# Altium PCB Mini_sys.PcbDoc
Units mil, origin at the board's own origin, x right, y up, seen from the top; angles counter-clockwise.
Board outline 1771.65 x 905.51 mil, 2 copper layers (Top, Bottom); 18 components, 23 nets, 81 pads, 18 vias.
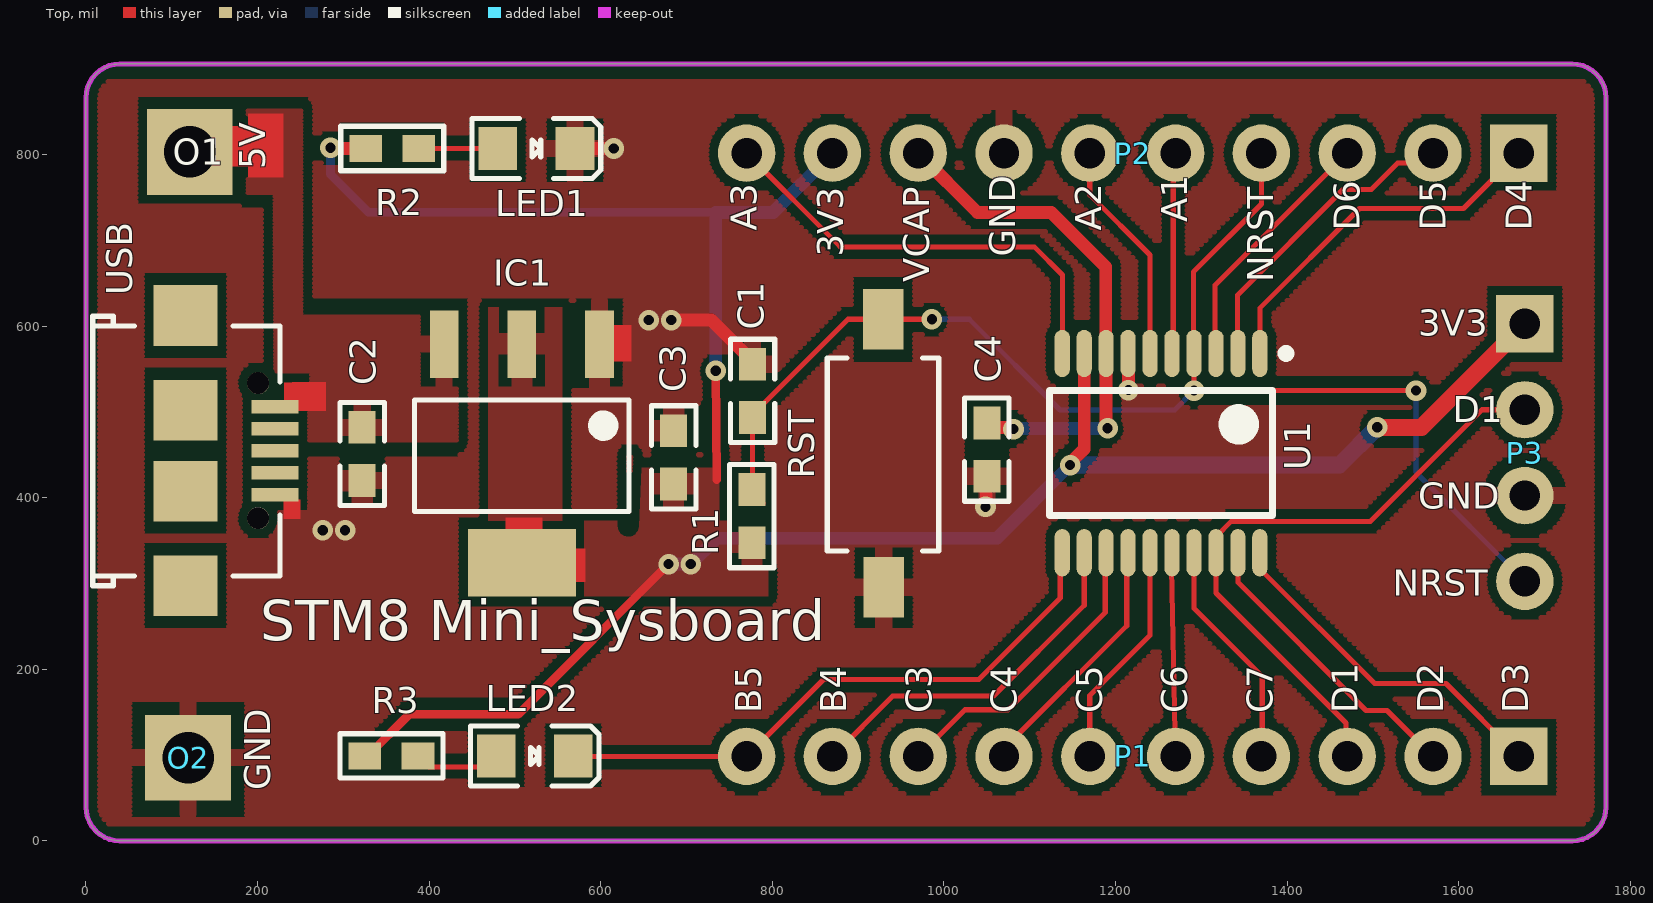
[diagram p0: Top view]
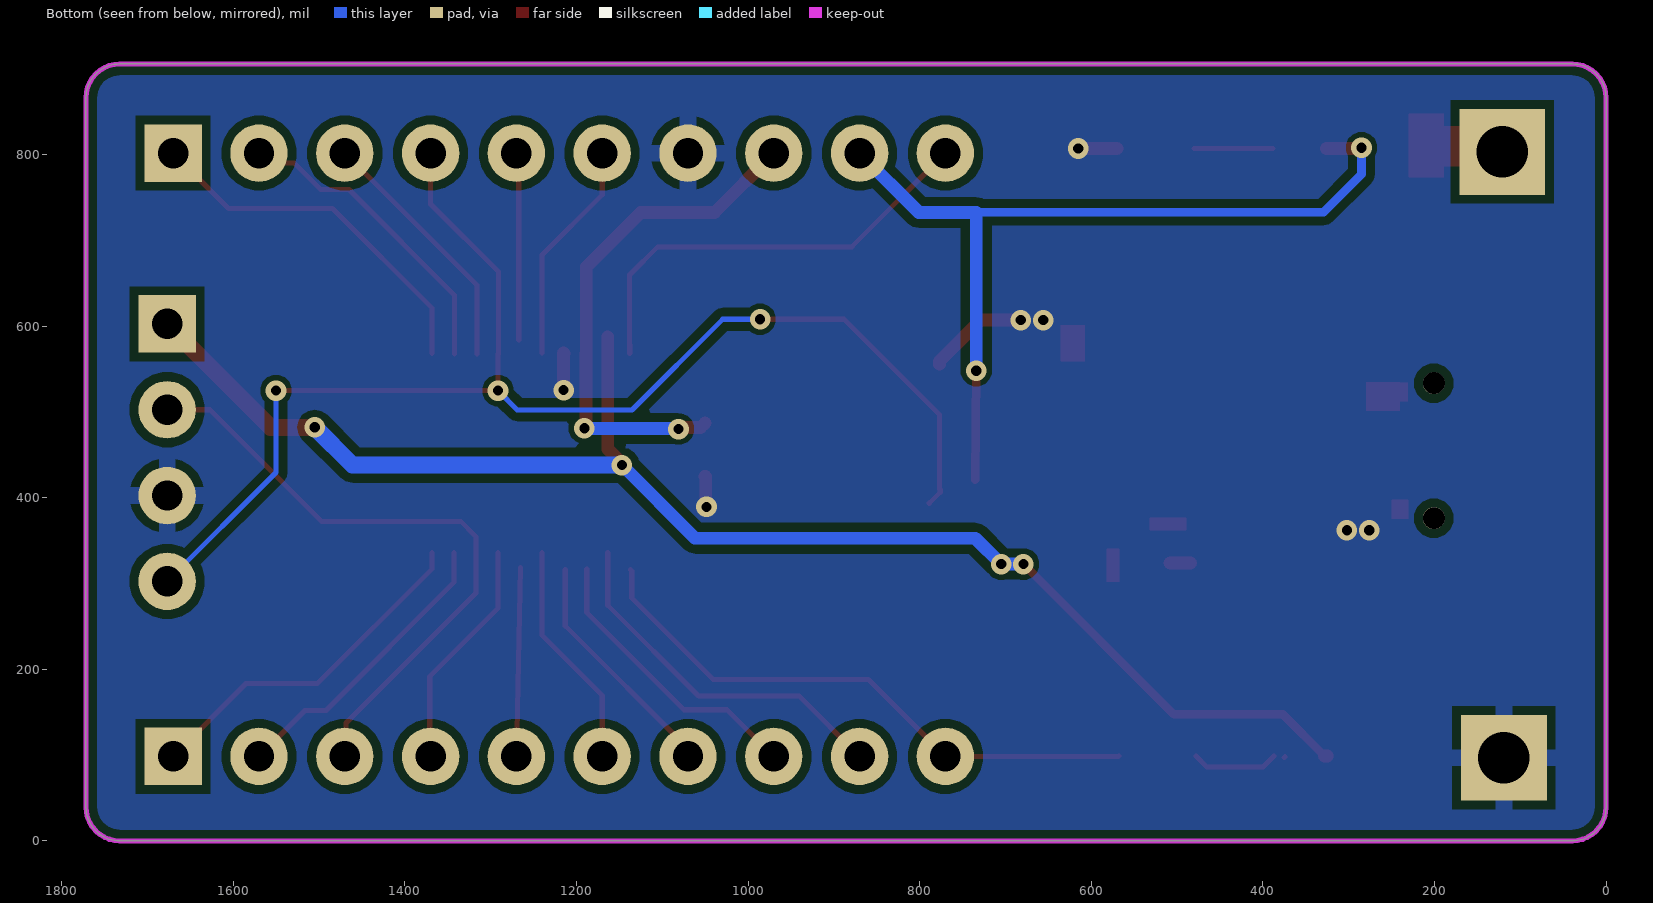
[diagram p1: Bottom view, seen from below]

## Layer stack, top to bottom
Top Solder: solder mask 0.4, Solder Resist, Dk 3.5
Top: signal copper 1.4
Dielectric 1: dielectric 12.6, FR-4, Dk 4.8
Bottom: signal copper 1.4
Bottom Solder: solder mask 0.4, Solder Resist, Dk 3.5

## Board outline
0,39.37 0,866.14 cw(c39.37,866.14) 39.37,905.51 1732.28,905.51 cw(c1732.28,866.14) 1771.65,866.14 1771.65,39.37 cw(c1732.28,39.37) 1732.28,0 39.37,0 cw(c39.37,39.37)

## Design rules (kind name [scope] priority, off if disabled: settings)
Clearance [All] p1: gap=6 ignorepadtopadclearanceinfootprint=TRUE except(10: Arc-Fill Arc-Poly Arc-Region Track-Fill Track-Poly Track-Region SMDPad-Fill SMDPad-Poly SMDPad-Region THPad-Fill THPad-Poly THPad-Region Fill-Fill Fill-Poly Fill-Region Poly-Poly Poly-Region Region-Region)
PolygonConnect [All] p1: thpad.connectstyle=Relief thpad.reliefconductorwidth=20 thpad.reliefentries=4 thpad.polygonreliefangle="90 Angle" thpad.airgapwidth=15 smdpad.connectstyle=Relief smdpad.reliefconductorwidth=20 smdpad.reliefentries=4 smdpad.polygonreliefangle="90 Angle" smdpad.airgapwidth=10 via.connectstyle=Direct via.reliefconductorwidth=10 via.reliefentries=4 via.polygonreliefangle="90 Angle" via.airgapwidth=10
RoomDefinition Mini_sys_board [InComponentClass('Mini_sys_board')] p1: confinementstyle=ConfineIn formatcopy=TRUE lockcomponents=FALSE outline -3750,-3685 -1750,-3685 -1750,-2685 -3750,-2685
RoutingVias [All] p1: holewidth=24 width=24 viastyle="Through Hole" minholewidth=24 minwidth=24 maxholewidth=24 maxwidth=24
SilkToSilkClearance [All] p1: silktosilkclearance=2
SilkToSolderMaskClearance [IsPad] p1: minsilkscreentomaskgap=2 clearancetoexposedcopper=TRUE
SolderMaskExpansion [All] p1: expansion=2.5 istentingtop=FALSE
Width PWR [InNetClass('PWR')] p1: maxlimit=20 minlimit=10 preferedwidth=15
Width [All] p2: maxlimit=6 minlimit=6 preferedwidth=6
28 further rules are at their usual default settings.

## Classes and differential pairs
net class D: D1 D2 D3 D4 D5 D6
net class C: C3 C4 C5 C6 C7
net class B: B4 B5
net class A: A1 A2 A3
net class PWR: 3V3 5V GND VCAP

## Components (designator, comment, footprint, x,y, rotation, side; value= is the part's Value field where it differs from the comment)
C1 "0.1uf" C0603 777,524.5 r90 top
C2 "0.1uf" C0603 322,451 r270 top
C3 "0.1uf" C0603 685,447 r90 top
C4 "0.1uf" C0603 1050,456 r270 top
IC1 "AMS1117" SOT223_N 508,449 r180 top
LED1 "LED" "LED 0805" 525,807 r0 top
LED2 "LED" "LED 0805" 523,99 r0 top
O1 "过孔" 过孔 121,803 r0 top
O2 "过孔" 过孔 119,97 r0 top
P1 "CON10" HDR2.54-LI-10P 1220,98.43 r180 top
P2 "CON10" HDR2.54-LI-10P 1220,801.57 r180 top
P3 "CON4" HDR2.54-WI-4P 1677,452.5 r270 top locked
R1 "10K" "R 0603" 776,378.5 r90 top
R2 "10K" "R 0603" 357,807 r0 top
R3 "10K" "R 0603" 356,99 r0 top
RST "Key" "TSW SMD-3*6*2.5" 929,453 r90 top (schematic designator Key1)
U1 "STM8S103F3" TSSOP20_L 1253,452 r270 top locked
USB "USB" USB-MICRO_E 168.17,454.76 r0 top (schematic designator USB1)

## Footprints (in the part's own frame and the unit in brackets; to place one, negate y for a bottom-side part, rotate by r counter-clockwise, add the part's x,y. Pads: shape width x height; smd on the part's side, far side on the other; paste and mask are expansions set on the pad)
C0603 [mm]
  rect 0.965x0.8 smd: 1(-0.787,0) 2(0.788,0)
  silkscreen extent -1.53,-0.66 1.53,0.66, body extent -0.83,-0.39 0.77,0.41, height 0.3
HDR2.54-LI-10P [mm] "排针，17脚"
  rect 1.7x1.7 hole 0.9: 1(-11.43,0)
  round 1.7 hole 0.9: 2(-8.89,0) 3(-6.35,0) 4(-3.81,0) 5(-1.27,0) 6(1.27,0) 7(3.81,0) 8(6.35,0) 9(8.89,0) 10(11.43,0)
  body extent -12.7,-1.27 12.7,1.27, height 8.5
HDR2.54-WI-4P [mm] "弯脚排针，4脚"
  rect 1.7x1.7 hole 0.9: 1(-3.81,0)
  round 1.7 hole 0.9: 2(-1.27,0) 3(1.27,0) 4(3.81,0)
  body extent -5.08,-1.27 5.08,7.77, height 4.85
"LED 0805" [mil]
  rect 45x50 smd: 1(-45,0) 2(45,0)
  silkscreen extent -75,-35 75,35, body extent -39,-25 39,25, height 32
"R 0603" [mm] "贴片带丝印"
  rect 0.965x0.8 smd: 1(-0.787,0) 2(0.788,0)
  silkscreen extent -1.53,-0.66 1.53,0.66, body extent -0.83,-0.39 0.77,0.41, height 0.3
SOT223_N [mm] "6.4x7x1.6mm(长宽高)"
  rect 0.85x2 smd: 1(-2.3,-3.302) 2(0,-3.302) 3(2.3,-3.302)
  rect 3.2x2 smd: 2(0,3.175)
  silkscreen extent -3.18,-1.65 3.18,1.65, body extent -3.25,-3.51 3.25,3.51, height 1.65
TSSOP20_L [mm] "TSOP, 20-Leads, Body 6.50x4.40mm, Pitch 0.65mm, IPC Medium Density"
  oval 1.4x0.45 smd: 1(-2.95,2.925) 2(-2.95,2.275) 3(-2.95,1.625) 4(-2.95,0.975) 5(-2.95,0.325) 6(-2.95,-0.325) 7(-2.95,-0.975) 8(-2.95,-1.625) 9(-2.95,-2.275) 10(-2.95,-2.925) 11(2.95,-2.925) 12(2.95,-2.275) 13(2.95,-1.625) 14(2.95,-0.975) 15(2.95,-0.325) 16(2.95,0.325) 17(2.95,0.975) 18(2.95,1.625) 19(2.95,2.275) 20(2.95,2.925)
  silkscreen extent -3.07,-3.3 1.85,3.83, body extent -3.2,-3.3 3.2,3.3, height 1.2
"TSW SMD-3*6*2.5" [mm] "3*6*2.5mm"
  rect 1.8x1.2 smd: 1(-3.996,-0.02) 2(3.937,0)
  silkscreen extent -2.92,-1.65 2.79,1.65, body extent -4,-1.75 4,1.75, height 2.59
USB-MICRO_E [mm]
  rect 1.4x0.4 smd: 1(1.325,1.3) 2(1.325,0.65) 3(1.325,0) 4(1.325,-0.65) 5(1.325,-1.3)
  round 0.65 hole 0.65 unplated: 6(0.825,-2) 7(0.825,2)
  rect 1.9x1.8 smd: 8(-1.325,-4) 9(-1.325,-1.2) 10(-1.325,1.2) 11(-1.325,4)
  silkscreen extent -4.07,-4 1.48,3.98, body extent -4.21,-4 1.87,4, height 2.8
过孔 [mil]
  rect 100x100 hole 60: 0(0,0)

## Part data
C1 C2 C3 C4: library part Cap, "电容"
P1 P2: "插针"
R1 R2 R3: library part Res, "电阻"
RST: "按键"

## Via types
v1: diameter 24, hole 12, Top to Bottom, tented both sides, 18 vias

## Nets (pads, with @x,y where several pads share a name; then routed paths per layer and width w, separated by ;. In a path a pad name is that pad's centre, name@x,y a point inside that pad or via, vN(x,y) a via of type N, cw(c..) or ccw(c..) an arc to the next point about the centre after c; other vN are vias at no path point)
3V3: C3.1 IC1.2 P2.9 P3.1 R1.1 R2.1 R3.1 U1.9 | length 2759
  Top w10: R3.1@328.24,99 376.84,147.59 503.99,147.59 v1(679.02,322.62) ; v1(734,548) 735,421
  Top w15: v1(285,808) 286,807 R2.1 ; R3.1 R3.1@328.24,99 ; IC1.2@484.38,324 IC1.2@508,324 ; v1(1147,438) 1147,440.44 1163.43,456.87 U1.9 U1.9@1163.43,587.58
  Top w20: v1@1146.23,437.23 v1(1147,438) ; v1@1147.2,437.8 v1@1147.2,439.18 ; v1(1505,482) 1556.5,482 P3.1
  Bottom w10: v1(285,808) 285,776.96 329.19,732.77 733.78,732.77 734,732.54
  Bottom w15: v1(679.02,322.62) v1(705.02,322.62) 735.18,352.78 1061.78,352.78 v1(1147,438) ; v1(734,548) 734,732.54 800.97,732.54 P2.9
  Bottom w20: v1(1147,438) 1461,438 v1(1505,482)
5V: C2.1 IC1.3 O1.0 USB.1
A1: P2.5 U1.5 | length 218.6
  Top w6: U1.5@1267.16,584.14 1267.16,798.73 P2.5
A2: P2.6 U1.6 | length 261.9
  Top w6: P2.6 1170,753 1240,683 U1.6@1240,568.65
A3: P2.10 U1.10 | length 518.3
  Top w6: P2.10 879.21,692.37 1105.29,692.37 1138,659.66 1138,582.69 U1.10@1138,578.43 ; U1.10 U1.10@1137.84,578.43
B4: P1.9 U1.12 | length 427.7
  Top w6: P1.9 940.32,168.75 1057.59,168.75 1163.43,274.59 U1.12
B5: LED2.2 P1.10 U1.11 | length 677.9
  Top w6: LED2.2 568.57,98.43 P1.10 859.57,188 1040.67,188 1135.6,282.93 1135.6,314.6 U1.11@1137,316
C3: P1.8 U1.13 | length 338.2
  Top w6: P1.8 1024.46,152.89 1074.55,152.89 1188,266.34 U1.13@1188,317
C4: P1.7 U1.14 | length 277
  Top w6: P1.7 1070,107.84 1212.98,250.82 U1.14@1212.98,316.25
C5: P1.6 U1.15 | length 266.5
  Top w6: P1.6 1170,169.43 1240.2,239.63 U1.15
C6: P1.5 U1.16 | length 227.1
  Top w6: P1.5@1265,103.43 P1.5 U1.16@1265,318.43
C7: P1.4 U1.17 | length 270.8
  Top w6: U1.17 1291.39,271.07 1371,191.45 1371,99.43 P1.4
D1: P1.3 P3.2 U1.18 | length 740.9
  Top w6: P1.3 1468.68,99.74 1468.68,137.38 1316.98,289.08 1316.98,354.56 1334.83,372.42 1375.55,372.42 1375.62,372.35 1496.9,372.35 1627.04,502.5 P3.2
D2: P1.2 U1.19 | length 345.9
  Top w6: U1.19 1342.57,301.43 1492,152 1516.43,152 P1.2
D3: P1.1 U1.20 | length 411.1
  Top w6: U1.20 1368.16,317.16 1502,183.31 1585.11,183.31 P1.1
D4: P2.1 U1.1 | length 429.4
  Top w6: U1.1 1368.16,620.84 1484.31,737 1605.43,737 P2.1
D5: P2.2 U1.2 | length 364.9
  Top w6: U1.2@1342,567.65 1342,636 1465.11,759.11 1498.02,759.11 1528.83,789.92 1558.34,789.92 P2.2
D6: P2.3 U1.3 | length 297.7
  Top w6: U1.3@1316,567.65 1316,584.32 1316,647.57 P2.3
GND: C1.2 C2.2 C3.2 C4.2 IC1.1 LED1.2 O2.0 P2.7 P3.3 RST.1 U1.7 USB.5 | length 243.2
  Top w15: LED1.2 v1(615,807) ; v1(682,607) 728.75,607 777,558.75 C1.2 ; v1(1048.43,389.21) 1049.21,389.99 1049.21,424.21 C4.2 ; U1.7 U1.7@1215,568.14 ; v1(1215,525.42) U1.7@1215,568.56
  other v1: 276,362 302,362 656,607
NetLED1_1: LED1.1 R2.2 | length 92
  Top w6: R2.2 LED1.1
NetLED2_1: LED2.1 R3.2 | length 103
  Top w6: R3.2@374,98 R3.2@375,97 ; R3.2 399.75,86.25 465.25,86.25 LED2.1
NRST: C1.1 P2.4 P3.4 R1.2 RST.2 U1.4 | length 1580.7
  Top w6: R1.2@788.75,393.51 776,406.26 R1.2 777,410.5 C1.1 777,496.74 888.26,608 RST.2 v1(986,608) ; U1.4@1291,567.65 1291,663.22 1370,742.22 P2.4 P2.4@1356.57,801.57 ; U1.4 v1(1291.39,524.83) v1(1550.17,524.83)
  Bottom w6: v1(986,608) 1029.5,608 1135.14,502.36 1268.91,502.36 v1(1291.39,524.83) ; v1@1551,524 v1(1550.17,524.83) 1550.17,429.33 P3.4
VCAP: C4.1 P2.8 U1.8 | length 608.5
  Top w15: P2.8 1039.23,732.35 1124.98,732.35 1188.5,668.83 1188.5,568.66 U1.8 1189,480.92 v1@1189,478 ; C4.1 1055.28,481.72 1079.28,481.72 v1(1081,480)
  Bottom w15: v1(1081,480) 1081.46,480.46 1190.23,480.46 v1(1190.69,480.92)
pads on no net: USB.2 USB.3 USB.4 USB.6 USB.7 USB.8 USB.9 USB.10 USB.11

## Polygon pours and split planes (outlines as drawn)
GND on Top "m" (hatched Horizontal grid 5 track 6, pour order 33): 0,39.37 ccw(c39.37,39.37) 39.37,0 1732.28,0 ccw(c1732.28,39.37) 1771.65,39.37 1771.65,866.14 ccw(c1732.28,866.14) 1732.28,905.51 39.37,905.51 ccw(c39.37,866.14) 0,866.14
5V on Top "Top-5V" (hatched Horizontal grid 4 track 5, pour order 39): 258,465 432,465 432,550 417.45,545.48 417.45,615 251,615 251,854 121,854 121,752 220.1,752 220.33,505.94 259.96,496.61 258,496
3V3 on Top "Top-3V3" (solid, remove dead copper, pour order 25): 555,285 795,285 795,373 738,373 738,435 632,435 632,373 555,373 555,622 469,622 469,345 555,345
GND on Top "GND_L01_P032" (hatched Horizontal grid 4 track 5, pour order 32): 582,617 584,619 709,619 709,462.87 710.87,461 709.87,460 645,460 645,476 582,539
no net on Top "NONET_L01_P023" (hatched Horizontal grid 4 track 5, remove dead copper, pour order 23): 632,367 632,449 635.95,449
GND on Top "GND_L01_P012" (hatched Horizontal grid 4 track 5, pour order 12): 220.33,403.57 220.33,341 322,341 322,420
GND on Bottom "GND_L02_P037" (solid, remove dead copper, pour order 37): 0,39.37 ccw(c39.37,39.37) 39.37,0 1732.28,0 ccw(c1732.28,39.37) 1771.65,39.37 1771.65,866.14 ccw(c1732.28,866.14) 1732.28,905.51 39.37,905.51 ccw(c39.37,866.14) 0,866.14

## Keep-outs
Keep-Out Layer:
  the board outline again, w5.98

## Other copper
Top:
  rectangle net 5V: 189,773 230,848
  rectangle net 5V: 240.15,501.27 280,535
  rectangle net GND: 607,559 636,601
  rectangle net 3V3: 567,302 582,341
  rectangle net 3V3: 489,362 532,377
  rectangle net 5V: 134,786 200,833
  rectangle net GND: 230,375 250,398
  rectangle net 5V: 231,512 250,534

## Silkscreen, mask and mechanical layers (free items; w line width, h text height)
Top Overlay:
  text "5V" at 209,783 h30 r90
  text "A1" at 1283.67,720.97 h30 r90
  text "A3" at 782,710.97 h30 r90
  text "A2" at 1183.33,710.97 h30 r90
  text "D6" at 1484.33,710.97 h30 r90
  text "D5" at 1584.67,710.97 h30 r90
  text "D4" at 1685,710.97 h30 r90
  text "3V3" at 882.33,680.98 h30 r90
  text "GND" at 1083,680.98 h30 r90
  text "VCAP" at 982.67,650.99 h30 r90
  text "NRST" at 1384,650.99 h30 r90
  text "3V3" at 1552.99,589 h30
  text "D1" at 1592.98,488 h30
  text "GND" at 1552.99,387 h30
  text "NRST" at 1523,286 h30
  text "STM8 Mini_Sysboard" at 203,218.02 h80
  text "B5" at 787,149 h30 r90
  text "B4" at 886.33,149 h30 r90
  text "C3" at 985.67,149 h30 r90
  text "C4" at 1085,149 h30 r90
  text "C5" at 1184.33,149 h30 r90
  text "C6" at 1283.67,149 h30 r90
  text "C7" at 1383,149 h30 r90
  text "D1" at 1482.33,149 h30 r90
  text "D2" at 1581.67,149 h30 r90
  text "D3" at 1681,149 h30 r90
  text "GND" at 215,59 h30 r90
Mechanical 1:
  the board outline again, w5.98

## Dimensions
0,39.37 to 1771.65,39.37 on Mechanical 1
39.37,905.51 to 39.37,0 on Mechanical 1